# Altium PCB NewSpeedRadar_Board.PcbDoc (part 4 of 4)
Units mm, origin at the board's own origin, x right, y up, seen from the top; angles counter-clockwise.
Board outline 150 x 110 mm, 2 copper layers (Top Layer, Bottom Layer), stack 1.571 mm thick; 208 components, 164 nets, 788 pads, 782 vias.
Unrouted connection lines stored in the file: 231.
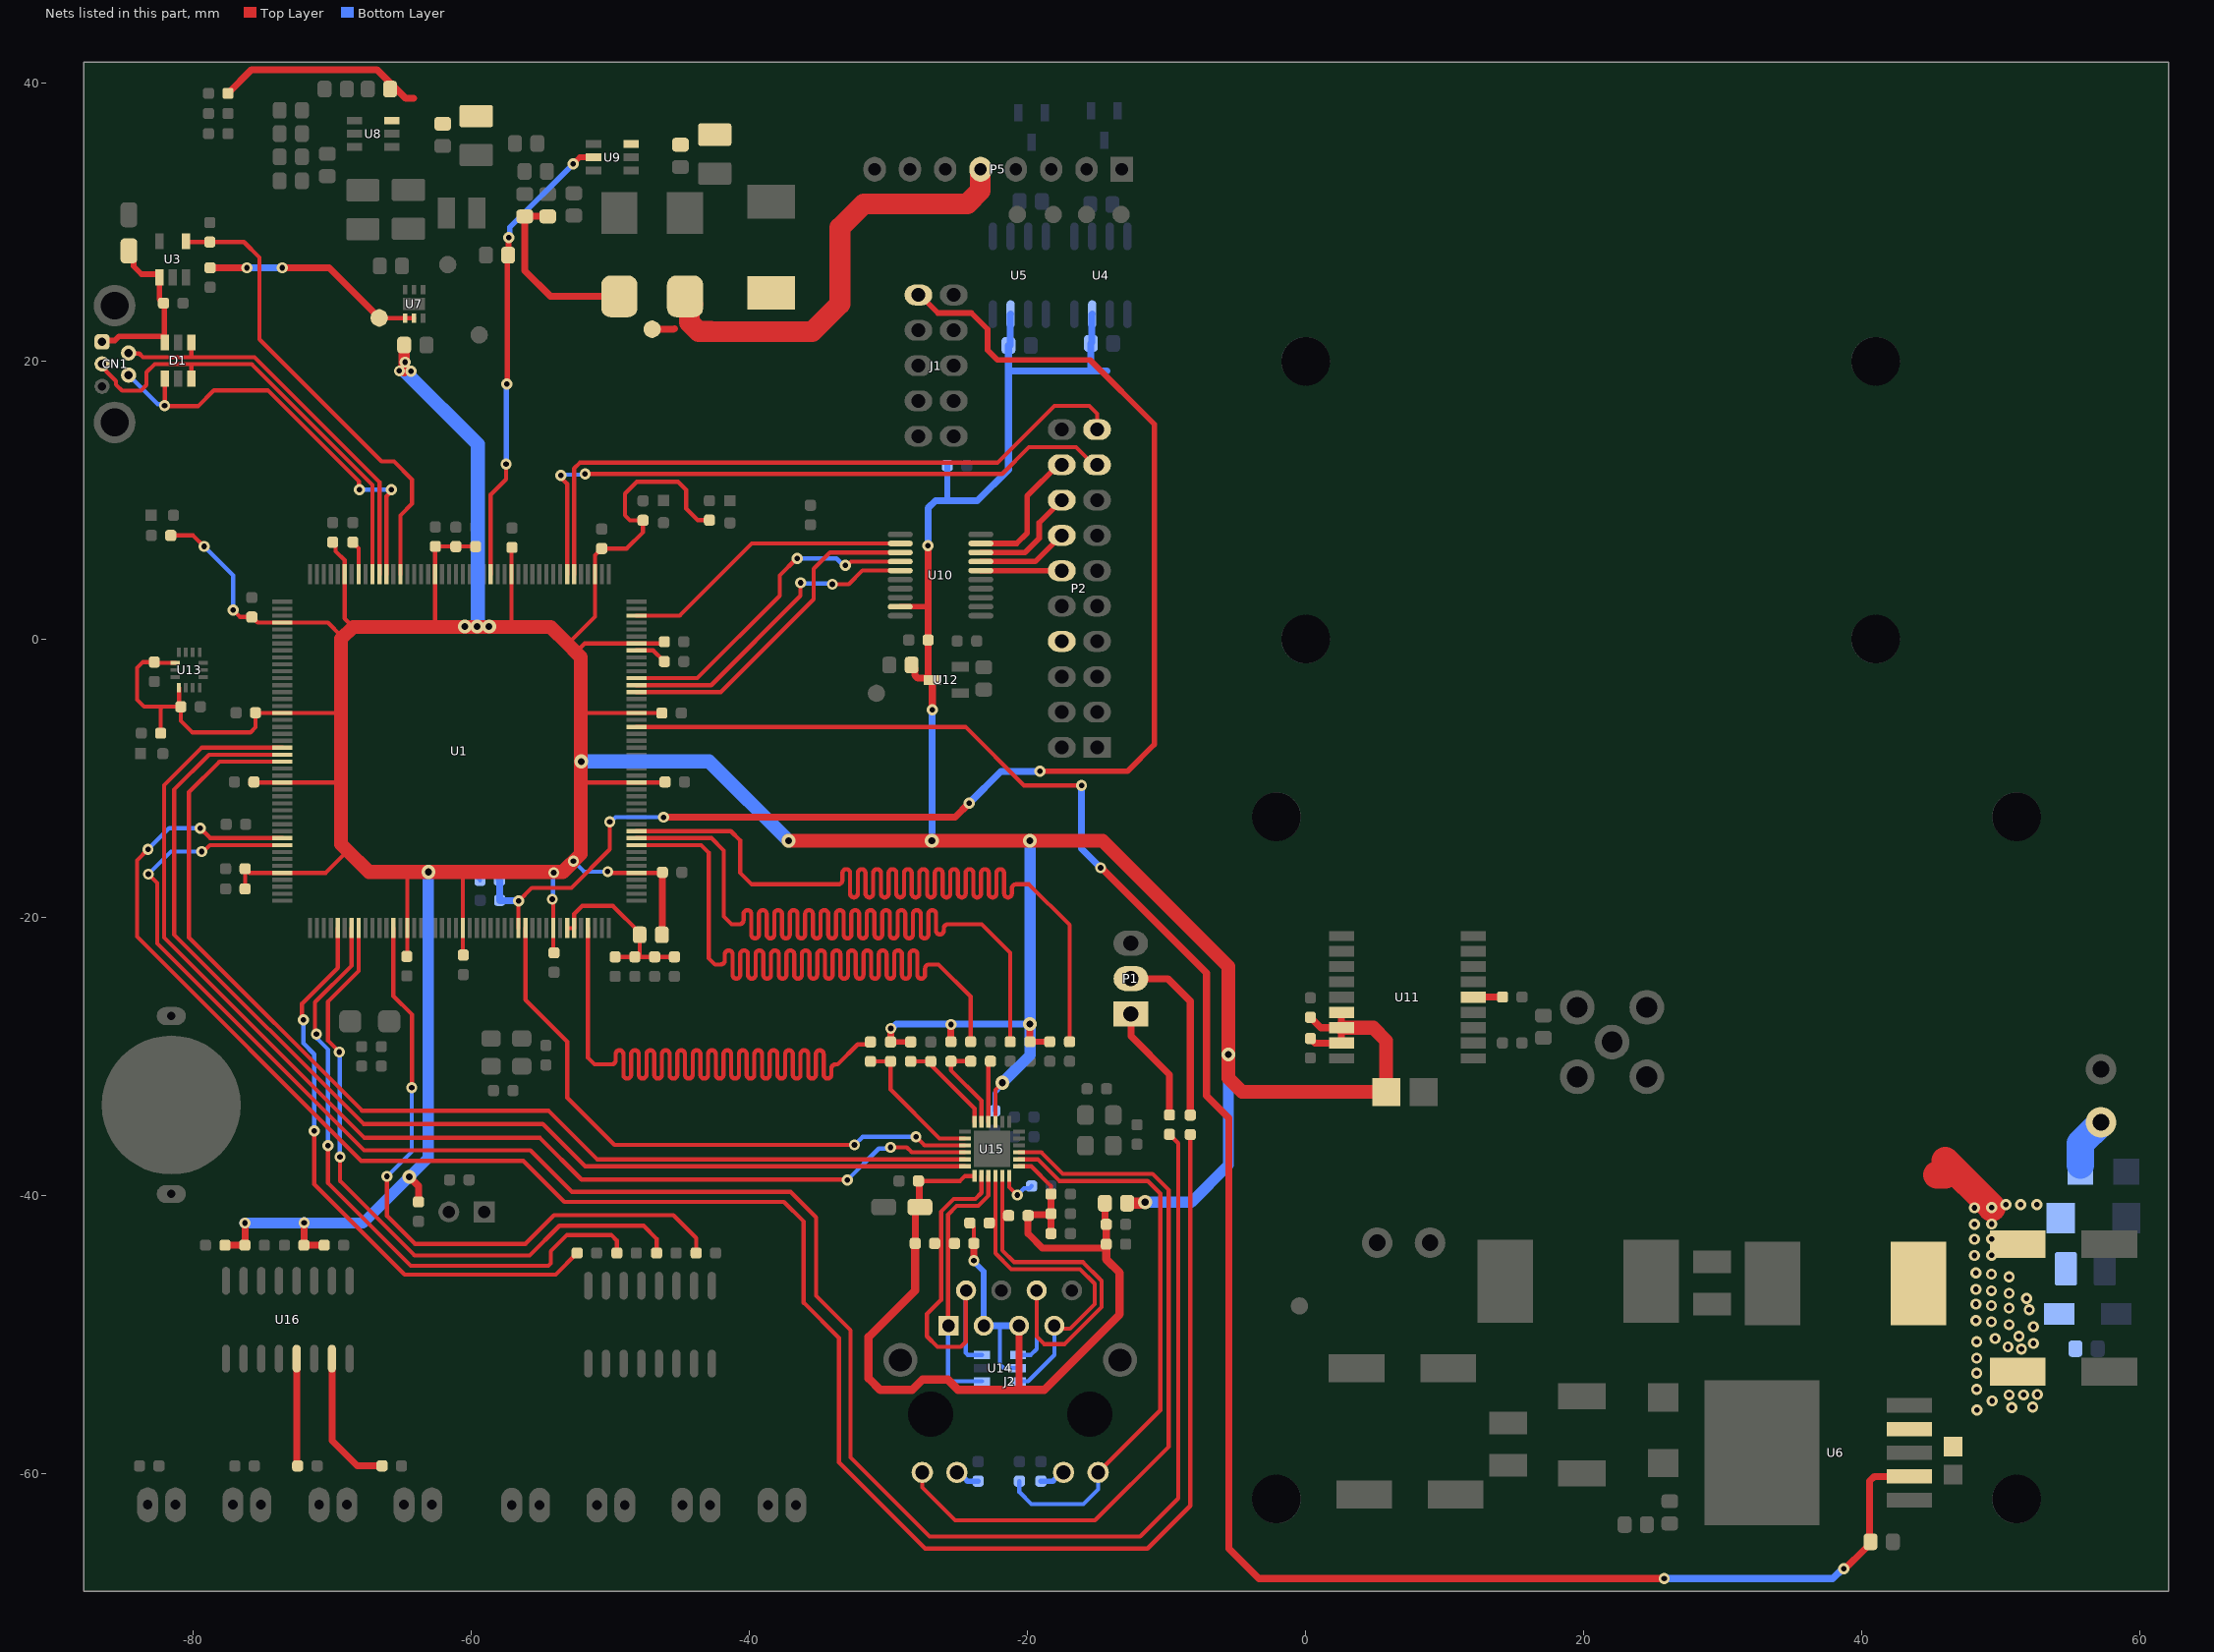
[diagram p3: the nets of this part, all layers, seen from the top]

## Via types
v1: diameter 0.8, hole 0.4, Top Layer to Bottom Layer, tented both sides, 480 vias
v2: diameter 0.8, hole 0.4, Top Layer to Bottom Layer, 288 vias
v3: diameter 1, hole 0.5, Top Layer to Bottom Layer, tented both sides, 14 vias

## Nets (pads, with @x,y where several pads share a name; then routed paths per layer and width w, separated by ;. In a path a pad name is that pad's centre, name@x,y a point inside that pad or via, vN(x,y) a via of type N, cw(c..) or ccw(c..) an arc to the next point about the centre after c; other vN are vias at no path point) (continued)
NetR48_2: R48.2 R55.1 U15.11 | length 6.7
  Top Layer w0.3: R55.1@-24.092,-30.356 R48.2@-25.515,-30.356 -25.515,-30.991 -23.314,-33.191 U15.11@-23.314,-34.711
NetR53_1: R53.1 U15.10 | length 4.4
  Top Layer w0.3: U15.10@-22.814,-34.711 -22.814,-30.5 R53.1@-22.67,-30.356
NetR54_1: R54.1 U15.24 | length 2.9
  Top Layer w0.3: U15.24@-21.314,-38.611 -21.314,-39.407 v1(-20.74,-39.982)
  Bottom Layer w0.3: v1(-20.74,-39.982) -20.26,-39.502 -19.885,-39.502 R54.1@-19.715,-39.333
NetR56_1: R56.1 R57.1 U15.12 | length 7.1
  Top Layer w0.3: R56.1@-28.41,-30.37 R57.1@-26.963,-30.37 ; R57.1@-26.937,-30.37 -26.937,-30.635 -23.814,-33.758 U15.12@-23.814,-34.711
NetR59_2: R59.2 R60.1 U15.14 | length 10.3
  Top Layer w0.3: R60.1@-31.306,-30.37 R59.2@-29.858,-30.37 -29.858,-32.388 -26.335,-35.911 U15.14@-24.514,-35.911
NetR62_2: R62.2 U16.5 | length 7.7
  Top Layer w0.5: U16.5@-72.581,-51.748 -72.581,-59.391 R62.2@-72.508,-59.464
NetR64_2: R64.2 U16.7 | length 10.2
  Top Layer w0.5: U16.7@-70.041,-51.748 -70.022,-51.767 -70.022,-57.654 -68.212,-59.464 R64.2@-66.437,-59.464
Out1: R9.1 U1.13 | length 47.7
  Top Layer w0.3: v1(-66.079,-38.636) -66.079,-41.481 -64.072,-43.487 -56.122,-43.487 -54.064,-41.43 -45.479,-41.43 -43.842,-43.067 R9.1@-43.842,-44.148 ; U1.13@-65.622,-20.779 -65.622,-25.656 -64.275,-27.003 -64.275,-32.235 v1(-64.301,-32.261)
  Bottom Layer w0.3: v1(-66.079,-38.636) -64.301,-36.858 v1(-64.301,-32.261)
Out2: R10.1 U1.8 | length 46.7
  Top Layer w0.3: v1(-69.508,-29.695) -70.32,-28.882 -70.32,-26.063 -68.122,-23.864 U1.8@-68.122,-20.779 ; v1(-69.457,-37.239) -69.457,-38.966 -64.097,-44.326 -55.817,-44.326 -53.683,-42.192 -47.613,-42.192 -46.687,-43.118 R10.1@-46.687,-44.148
  Bottom Layer w0.3: v1(-69.508,-29.695) -69.482,-29.721 -69.482,-37.214 v1(-69.457,-37.239)
Out3: R16.1 U1.7 | length 45.5
  Top Layer w0.3: v1(-71.159,-28.4) -71.254,-28.304 -71.254,-26.108 -68.622,-23.475 U1.7@-68.622,-20.779 ; v1(-70.32,-36.426) -70.32,-39.119 -64.377,-45.062 -54.469,-45.062 -54.293,-44.886 -54.293,-44.021 -53.125,-42.852 -49.95,-42.852 -49.546,-43.256 R16.1@-49.546,-44.148
  Bottom Layer w0.3: v1(-71.159,-28.4) -71.063,-28.495 -71.063,-28.775 -70.32,-29.517 v1(-70.32,-36.426)
Out4: R21.1 U1.5 | length 42.1
  Top Layer w0.3: v1(-72.098,-27.384) -72.194,-27.288 -72.194,-26.209 -69.622,-23.637 U1.5@-69.622,-20.779 ; v1(-71.311,-35.359) -71.311,-39.195 -64.809,-45.697 -53.952,-45.697 R21.1@-52.402,-44.148
  Bottom Layer w0.3: v1(-72.098,-27.384) -72.098,-29.06 -71.311,-29.848 v1(-71.311,-35.359)
PC_RX: P1.1 R35.1 | length 8.9
  Top Layer w0.5: P1.1@-12.563,-26.952 -12.563,-28.55 -9.792,-31.321 R35.1@-9.792,-34.216 ; P1.1@-12.309,-26.952 P1.1@-12.309,-26.444
PC_TX: P1.2 R36.1 | length 13.1
  Top Layer w0.5: P1.2@-12.563,-24.412 -9.919,-24.412 -8.294,-26.038 R36.1@-8.294,-34.228
PHI_LEDGRN_A: J2.9 U15.3 | length 52.3
  Top Layer w0.3: J2.9@-27.575,-59.931 -27.575,-61.011 -25.21,-63.376 -15.152,-63.376 -9.843,-58.067 -9.843,-39.627 -11.011,-38.458 -17.463,-38.458 -19.011,-36.911 U15.3@-20.614,-36.911
PHI_LEDGRN_K: J2.10 R58.1 | length 1.8
  Bottom Layer w0.4: J2.10@-25.085,-59.931 -24.957,-59.931 -24.328,-60.559 R58.1@-23.559,-60.559
PHI_LEDYEL_A: J2.12 R42.2 U15.2 | length 41.6
  Top Layer w0.3: U15.2@-20.614,-37.411 -19.273,-37.411 -17.717,-38.966 -11.367,-38.966 -10.453,-39.881 -10.453,-55.459 J2.12@-14.925,-59.931
  Bottom Layer w0.3: R42.2@-20.587,-60.559 -20.587,-61.344 -19.724,-62.207 -15.975,-62.207 -14.925,-61.157 J2.12@-14.925,-59.931
PHI_LEDYEL_K: J2.11 R43.2 | length 1.9
  Bottom Layer w0.4: R43.2@-19.038,-60.559 -18.171,-60.559 -17.542,-59.931 J2.11@-17.415,-59.931
PHI_RCT: C66.2 C67.2 C70.2 C71.2 C72.1 C75.2 C76.2 FB2.1 J2.3 J2.5 R44.2 R45.2 R49.2 R50.2 U14.5 U15.1 U15.19 | length 84.4
  Top Layer w0.3: C70.2@-27.849,-38.966 -24.854,-38.966 -24.499,-38.611 U15.19@-23.814,-38.611 ; R44.2@-24.157,-41.989 -24.157,-42.016 -23.864,-42.309 R50.2@-23.864,-43.462 ; U15.1@-20.614,-37.911 -19.738,-37.911 -18.315,-39.333 C71.2@-18.315,-39.906 C71.2@-18.315,-40.287
  Top Layer w0.5: R45.2@-28.083,-43.462 -28.083,-41.184 C72.1@-27.745,-40.846 -27.797,-40.794 -27.797,-39.018 C70.2@-27.849,-38.966 ; v1(-23.864,-44.688) R50.2@-23.864,-43.462 ; J2.5@-20.615,-49.381 -20.615,-53.926 -20.563,-53.978 ; -19.963,-42.765 R49.2@-19.963,-41.455 -19.9,-41.392 -18.379,-41.392 C76.2@-18.315,-41.328 ; -19.914,-42.814 -18.936,-43.792 -14.62,-43.792 C67.2@-14.34,-43.513 C66.2@-14.34,-42.09 ; C71.2@-18.315,-40.287 C76.2@-18.315,-41.328 ; C75.2@-18.191,-42.875 C75.2@-18.315,-42.751 C76.2@-18.315,-41.328 ; C66.2@-14.44,-42.09 FB2.1@-14.44,-40.566
  Top Layer w0.6: R45.2@-28.083,-43.462 -28.083,-46.842 -31.435,-50.193 -31.435,-53.165 -30.596,-54.003 -28.31,-54.003 -27.574,-53.266 -25.72,-53.266 -25.008,-53.978 -20.563,-53.978 -18.785,-53.978 -13.374,-48.566 -13.374,-45.57 -14.34,-44.603 -14.34,-43.792 C67.2@-14.34,-43.513
  Bottom Layer w0.3: -22.087,-49.381 -21.986,-49.482 -21.986,-52.174 -21.833,-52.327 -21.732,-52.428 U14.5@-20.684,-52.428
  Bottom Layer w0.4: v1@-23.864,-44.769 -23.155,-45.478 J2.3@-23.155,-49.381
  Bottom Layer w0.5: v1@-23.864,-44.769 v1(-23.864,-44.688) ; J2.3@-23.155,-49.381 -22.087,-49.381 J2.5@-20.615,-49.381
RADAR_PWR_EN: R24.1 U1.106 U9.5 | length 33.6
  Top Layer w0.3: U1.106@-58.622,4.671 -58.622,10.401 -57.519,11.504 v1(-57.519,12.596)
  Top Layer w0.4: v1(-57.468,18.362) -57.417,18.412 -57.417,27.582 R24.1@-57.366,27.633 -57.341,27.658 -57.341,28.877 v1(-57.316,28.903) ; v1(-52.693,34.186) -52.21,34.668 U9.5@-51.223,34.668
  Bottom Layer w0.4: v1(-57.519,12.596) -57.493,12.621 -57.493,18.336 v1(-57.468,18.362) ; v1(-57.316,28.903) -57.239,28.979 -57.239,29.64 v1(-52.693,34.186)
RD_N: J2.7 R44.1 U14.6 U15.22 | length 24.3
  Top Layer w0.3: U15.22@-22.314,-38.611 -22.314,-44.169 -21.175,-45.308 -16.222,-45.308 -15.171,-46.36 -15.171,-47.823 -16.948,-49.6 -17.855,-49.6 J2.7@-18.075,-49.381
  Bottom Layer w0.3: U14.6@-20.684,-53.378 -19.964,-53.378 -18.075,-51.489 J2.7@-18.075,-49.381
RD_P: J2.6 R49.1 U14.4 U15.23 | length 30.3
  Top Layer w0.3: U15.23@-21.814,-38.611 -21.814,-43.962 -20.968,-44.808 -16.015,-44.808 -15.869,-44.955 -14.903,-45.92 -14.671,-46.153 -14.671,-48.034 -17.338,-50.701 -18.811,-50.701 -19.345,-50.167 J2.6@-19.345,-46.841
  Bottom Layer w0.3: U14.4@-20.684,-51.478 -19.766,-51.478 -19.345,-51.057 J2.6@-19.345,-46.841
RESET#: C13.2 J1.10 R11.2 U1.31 | length 101.1
  Top Layer w0.3: U1.31@-56.622,-20.779 -56.622,-18.841 v1(-56.604,-18.824) -55.665,-17.884 -52.82,-17.884 -50.051,-15.116 v1(-50.051,-13.134)
  Top Layer w0.4: J1.10@-27.852,24.762 -27.75,24.762 -26.455,23.467 -24.042,23.467 -22.873,22.299 -22.873,20.798 -22.164,20.089 -15.507,20.089 -10.886,15.468 -10.886,-7.572 -12.816,-9.502 v1(-19.116,-9.502)
  Top Layer w0.5: v1(-46.19,-12.804) -25.212,-12.804 v1(-24.196,-11.788)
  Bottom Layer w0.3: v1(-50.051,-13.134) -49.956,-13.134 -49.625,-12.804 v1(-46.19,-12.804)
  Bottom Layer w0.5: R11.2@-57.99,-17.332 -57.985,-17.337 -57.985,-18.774 C13.2@-57.979,-18.78 -57.957,-18.802 -56.627,-18.802 v1(-56.604,-18.824) ; v1(-24.196,-11.788) -21.91,-9.502 v1(-19.116,-9.502)
RK3588_RX_M2_3V3: P2.19 U1.94 | length 48.5
  Top Layer w0.3: U1.94@-52.622,4.671 -52.622,12.286 -52.21,12.697 -22.162,12.697 -18.073,16.787 -15.558,16.787 -14.999,16.228 P2.19@-14.999,15.085
RK3588_TX_M2_3V3: P2.17 U1.95 | length 47.3
  Top Layer w0.3: v1(-53.582,11.783) -53.582,11.648 -53.122,11.188 U1.95@-53.122,4.671 ; v1(-51.829,11.885) -21.832,11.885 -19.901,13.815 -16.519,13.815 -15.249,12.545 P2.17@-14.999,12.545
  Bottom Layer w0.3: v1(-53.582,11.783) -53.531,11.834 -51.88,11.834 v1(-51.829,11.885)
RK_PWR_EN: R20.1 U1.70 U6.2 | length 148.7
  Top Layer w0.3: U1.70@-48.147,-6.304 -24.472,-6.304 -20.259,-10.518 v1(-16.118,-10.518)
  Top Layer w0.5: v1(-14.747,-16.436) -14.696,-16.436 -7.127,-24.006 -7.127,-32.845 -5.527,-34.445 -5.527,-65.408 -3.368,-67.567 v1(25.792,-67.567) ; v1(38.72,-66.855) 38.801,-66.855 38.951,-66.705 38.957,-66.705 40.064,-65.598 40.644,-65.019 R20.1@40.644,-64.919 40.576,-64.851 40.576,-60.556 40.914,-60.218 U6.2@43.425,-60.218
  Bottom Layer w0.5: v1(-16.118,-10.518) -16.118,-15.065 v1(-14.747,-16.436) ; v1(25.792,-67.567) 37.928,-67.567 38.639,-66.855 v1(38.72,-66.855)
RMII_CRS_DV: R55.2 U1.53 | length 82.7
  Top Layer w0.3: U1.53@-48.147,-14.804 -43.479,-14.804 -42.939,-15.344 -42.939,-22.939 -42.482,-23.396 -42.228,-23.396 -42.078,-23.396 ccw(c-42.078,-23.096) -41.778,-23.096 -41.778,-22.657 cw(c-41.501,-22.657) -41.224,-22.657 -41.224,-24.135 ccw(c-40.947,-24.135) -40.67,-24.135 -40.67,-22.657 cw(c-40.393,-22.657) -40.116,-22.657 -40.116,-24.135 ccw(c-39.839,-24.135) -39.562,-24.135 -39.562,-22.657 cw(c-39.285,-22.657) -39.008,-22.657 -39.008,-24.135 ccw(c-38.731,-24.135) -38.454,-24.135 -38.454,-22.657 cw(c-38.177,-22.657) -37.9,-22.657 -37.9,-24.135 ccw(c-37.623,-24.135) -37.346,-24.135 -37.346,-22.657 cw(c-37.069,-22.657) -36.792,-22.657 -36.792,-24.135 ccw(c-36.515,-24.135) -36.238,-24.135 -36.238,-22.657 cw(c-35.961,-22.657) -35.684,-22.657 -35.684,-24.135 ccw(c-35.407,-24.135) -35.13,-24.135 -35.13,-22.657 cw(c-34.853,-22.657) -34.576,-22.657 -34.576,-24.135 ccw(c-34.299,-24.135) -34.022,-24.135 -34.022,-22.657 cw(c-33.745,-22.657) -33.468,-22.657 -33.468,-24.135 ccw(c-33.191,-24.135) -32.914,-24.135 -32.914,-22.657 cw(c-32.637,-22.657) -32.36,-22.657 -32.36,-24.135 ccw(c-32.083,-24.135) -31.806,-24.135 -31.806,-22.657 cw(c-31.529,-22.657) -31.252,-22.657 -31.252,-24.135 ccw(c-30.975,-24.135) -30.698,-24.135 -30.698,-22.657 cw(c-30.421,-22.657) -30.144,-22.657 -30.144,-24.135 ccw(c-29.867,-24.135) -29.59,-24.135 -29.59,-22.657 cw(c-29.313,-22.657) -29.036,-22.657 -29.036,-24.135 ccw(c-28.759,-24.135) -28.482,-24.135 -28.482,-22.657 cw(c-28.205,-22.657) -27.928,-22.657 -27.928,-24.135 ccw(c-27.651,-24.135) -27.374,-24.135 -27.374,-23.696 cw(c-27.074,-23.696) -27.074,-23.396 -26.531,-23.396 -26.403,-23.396 -24.092,-25.706 -24.092,-26.006 ; R55.2@-24.092,-28.956 -24.092,-27.257 -24.092,-25.936
RMII_nRESET: U1.32 U15.15 | length 44
  Top Layer w0.3: U1.32@-56.122,-20.779 -56.122,-25.936 -53.112,-28.946 -53.112,-32.984 -49.721,-36.375 v1(-32.449,-36.375) ; v1(-28.029,-35.791) -27.41,-36.411 U15.15@-24.514,-36.411
  Bottom Layer w0.3: v1(-32.449,-36.375) -31.865,-35.791 v1(-28.029,-35.791)
RMII_REF_CLK: R60.2 U1.41 | length 80.5
  Top Layer w0.3: U1.41@-51.622,-20.779 -51.622,-30.106 -51.143,-30.584 -50.813,-30.584 -49.929,-30.584 ccw(c-49.929,-30.284) -49.629,-30.284 -49.629,-29.845 cw(c-49.352,-29.845) -49.075,-29.845 -49.075,-31.323 ccw(c-48.798,-31.323) -48.521,-31.323 -48.521,-29.845 cw(c-48.244,-29.845) -47.967,-29.845 -47.967,-31.323 ccw(c-47.69,-31.323) -47.413,-31.323 -47.413,-29.845 cw(c-47.136,-29.845) -46.859,-29.845 -46.859,-31.323 ccw(c-46.582,-31.323) -46.305,-31.323 -46.305,-29.845 cw(c-46.028,-29.845) -45.751,-29.845 -45.751,-31.323 ccw(c-45.474,-31.323) -45.197,-31.323 -45.197,-29.845 cw(c-44.92,-29.845) -44.643,-29.845 -44.643,-31.323 ccw(c-44.366,-31.323) -44.089,-31.323 -44.089,-29.845 cw(c-43.812,-29.845) -43.535,-29.845 -43.535,-31.323 ccw(c-43.258,-31.323) -42.981,-31.323 -42.981,-29.845 cw(c-42.704,-29.845) -42.427,-29.845 -42.427,-31.323 ccw(c-42.15,-31.323) -41.873,-31.323 -41.873,-29.845 cw(c-41.596,-29.845) -41.319,-29.845 -41.319,-31.323 ccw(c-41.042,-31.323) -40.765,-31.323 -40.765,-29.845 cw(c-40.488,-29.845) -40.211,-29.845 -40.211,-31.323 ccw(c-39.934,-31.323) -39.657,-31.323 -39.657,-29.845 cw(c-39.38,-29.845) -39.103,-29.845 -39.103,-31.323 ccw(c-38.826,-31.323) -38.549,-31.323 -38.549,-29.845 cw(c-38.272,-29.845) -37.995,-29.845 -37.995,-31.323 ccw(c-37.718,-31.323) -37.441,-31.323 -37.441,-29.845 cw(c-37.164,-29.845) -36.887,-29.845 -36.887,-31.323 ccw(c-36.61,-31.323) -36.333,-31.323 -36.333,-29.845 cw(c-36.056,-29.845) -35.779,-29.845 -35.779,-31.323 ccw(c-35.502,-31.323) -35.225,-31.323 -35.225,-29.845 cw(c-34.948,-29.845) -34.671,-29.845 -34.671,-31.323 ccw(c-34.394,-31.323) -34.117,-31.323 -34.117,-30.884 cw(c-33.817,-30.884) -33.817,-30.584 -33.667,-30.584 -32.229,-29.146 -31.482,-29.146 R60.2@-31.306,-28.97
RMII_RXD0: R51.2 U1.54 | length 85.3
  Top Layer w0.3: U1.54@-48.147,-14.304 -42.736,-14.304 -41.847,-15.193 -41.847,-19.942 -41.288,-20.5 -40.882,-20.5 -40.732,-20.5 ccw(c-40.732,-20.2) -40.432,-20.2 -40.432,-19.761 cw(c-40.155,-19.761) -39.878,-19.761 -39.878,-21.239 ccw(c-39.601,-21.239) -39.324,-21.239 -39.324,-19.761 cw(c-39.047,-19.761) -38.77,-19.761 -38.77,-21.239 ccw(c-38.493,-21.239) -38.216,-21.239 -38.216,-19.761 cw(c-37.939,-19.761) -37.662,-19.761 -37.662,-21.239 ccw(c-37.385,-21.239) -37.108,-21.239 -37.108,-19.761 cw(c-36.831,-19.761) -36.554,-19.761 -36.554,-21.239 ccw(c-36.277,-21.239) -36,-21.239 -36,-19.761 cw(c-35.723,-19.761) -35.446,-19.761 -35.446,-21.239 ccw(c-35.169,-21.239) -34.892,-21.239 -34.892,-19.761 cw(c-34.615,-19.761) -34.338,-19.761 -34.338,-21.239 ccw(c-34.061,-21.239) -33.784,-21.239 -33.784,-19.761 cw(c-33.507,-19.761) -33.23,-19.761 -33.23,-21.239 ccw(c-32.953,-21.239) -32.676,-21.239 -32.676,-19.761 cw(c-32.399,-19.761) -32.122,-19.761 -32.122,-21.239 ccw(c-31.845,-21.239) -31.568,-21.239 -31.568,-19.761 cw(c-31.291,-19.761) -31.014,-19.761 -31.014,-21.239 ccw(c-30.737,-21.239) -30.46,-21.239 -30.46,-19.761 cw(c-30.183,-19.761) -29.906,-19.761 -29.906,-21.239 ccw(c-29.629,-21.239) -29.352,-21.239 -29.352,-19.761 cw(c-29.075,-19.761) -28.798,-19.761 -28.798,-21.239 ccw(c-28.521,-21.239) -28.244,-21.239 -28.244,-19.761 cw(c-27.967,-19.761) -27.69,-19.761 -27.69,-21.239 ccw(c-27.413,-21.239) -27.136,-21.239 -27.136,-19.761 cw(c-26.859,-19.761) -26.582,-19.761 -26.582,-20.962 ccw(c-26.305,-20.962) -26.028,-20.962 -26.028,-20.8 cw(c-25.728,-20.8) -25.728,-20.5 -25.164,-20.5 -24.6,-20.5 -23.305,-20.5 -21.248,-22.558 R51.2@-21.248,-28.956
RMII_RXD1: R52.2 U1.55 | length 82.9
  Top Layer w0.3: U1.55@-48.147,-13.804 -41.339,-13.804 -40.679,-14.465 -40.679,-16.792 -39.84,-17.63 -33.77,-17.63 -33.62,-17.63 ccw(c-33.62,-17.33) -33.32,-17.33 -33.32,-16.815 cw(c-33.043,-16.815) -32.766,-16.815 -32.766,-18.293 ccw(c-32.489,-18.293) -32.212,-18.293 -32.212,-16.815 cw(c-31.935,-16.815) -31.658,-16.815 -31.658,-18.293 ccw(c-31.381,-18.293) -31.104,-18.293 -31.104,-16.815 cw(c-30.827,-16.815) -30.55,-16.815 -30.55,-18.293 ccw(c-30.273,-18.293) -29.996,-18.293 -29.996,-16.815 cw(c-29.719,-16.815) -29.442,-16.815 -29.442,-18.293 ccw(c-29.165,-18.293) -28.888,-18.293 -28.888,-16.815 cw(c-28.611,-16.815) -28.334,-16.815 -28.334,-18.293 ccw(c-28.057,-18.293) -27.78,-18.293 -27.78,-16.815 cw(c-27.503,-16.815) -27.226,-16.815 -27.226,-18.293 ccw(c-26.949,-18.293) -26.672,-18.293 -26.672,-16.815 cw(c-26.395,-16.815) -26.118,-16.815 -26.118,-18.293 ccw(c-25.841,-18.293) -25.564,-18.293 -25.564,-16.815 cw(c-25.287,-16.815) -25.01,-16.815 -25.01,-18.293 ccw(c-24.733,-18.293) -24.456,-18.293 -24.456,-16.815 cw(c-24.179,-16.815) -23.902,-16.815 -23.902,-18.293 ccw(c-23.625,-18.293) -23.348,-18.293 -23.348,-16.815 cw(c-23.071,-16.815) -22.794,-16.815 -22.794,-18.293 ccw(c-22.517,-18.293) -22.24,-18.293 -22.24,-16.815 cw(c-21.963,-16.815) -21.686,-16.815 -21.686,-18.293 ccw(c-21.409,-18.293) -21.132,-18.293 -21.132,-17.93 cw(c-20.832,-17.93) -20.832,-17.63 -20.003,-17.63 -19.901,-17.63 -16.98,-20.551 R52.2@-16.98,-28.956
RMII_TX_EN: U1.154 U15.16 | length 86.5
  Top Layer w0.3: U1.154@-73.597,-7.804 -79.418,-7.804 -82.106,-10.493 -82.106,-21.466 -67.704,-35.867 -55.08,-35.867 -52.083,-38.865 -32.982,-38.865 v1(-32.957,-38.89) ; v1(-29.858,-36.553) -28.685,-36.553 -28.328,-36.911 U15.16@-24.514,-36.911
  Bottom Layer w0.3: v1(-32.957,-38.89) -30.708,-36.641 -29.946,-36.641 v1(-29.858,-36.553)
RMII_TXD0: U1.156 U15.17 | length 80.5
  Top Layer w0.3: U1.156@-73.597,-8.804 -78.132,-8.804 -80.328,-11.001 -80.328,-21.466 -67.882,-33.912 -54.465,-33.912 -50.966,-37.411 U15.17@-24.514,-37.411
RMII_TXD1: U1.155 U15.18 | length 83
  Top Layer w0.3: U1.155@-73.597,-8.304 -78.876,-8.304 -81.395,-10.823 -81.395,-21.237 -67.768,-34.864 -54.876,-34.864 -51.829,-37.911 U15.18@-24.514,-37.911
RO1_3V3: P2.8
SPI1_CLK_M2_1V8: P2.16 U10.8 | length 8
  Top Layer w0.4: U10.8@-23.362,6.238 -20.188,6.238 -19.165,7.262 -19.165,8.379 P2.16@-17.539,10.005
SPI1_CLK_M2_3V3: U1.75 U10.13 | length 24.4
  Top Layer w0.3: U1.75@-48.147,-3.804 -42.061,-3.804 -35.383,2.874 -35.383,5.065 -34.209,6.238 U10.13@-29.162,6.238
SPI1_CS0_M2_1V8: P2.18 U10.9 | length 9.7
  Top Layer w0.4: U10.9@-23.362,6.888 -20.783,6.888 -20.028,7.643 -20.028,10.306 -17.789,12.545 P2.18@-17.539,12.545
SPI1_CS0_M2_3V3: U1.86 U10.12 | length 21.1
  Top Layer w0.3: U1.86@-48.147,1.696 -45.026,1.696 -39.833,6.888 U10.12@-29.162,6.888
SPI1_MISO_M2_1V8: P2.12 U10.6 | length 5.8
  Top Layer w0.4: U10.6@-23.362,4.938 -17.553,4.938 P2.12@-17.539,4.925
SPI1_MISO_M2_3V3: U1.76 U10.15 | length 23
  Top Layer w0.3: U1.76@-48.147,-3.304 -42.761,-3.304 -36.335,3.122 v1(-36.335,4.061) ; v1(-34.049,3.96) -32.855,3.96 -31.877,4.938 U10.15@-29.162,4.938
  Bottom Layer w0.3: v1(-36.335,4.061) -36.284,4.011 -34.1,4.011 v1(-34.049,3.96)
SPI1_MOSI_M2_1V8: P2.14 U10.7 | length 6.6
  Top Layer w0.4: U10.7@-23.362,5.588 -19.456,5.588 -17.579,7.465 P2.14@-17.539,7.465
SPI1_MOSI_M2_3V3: U1.77 U10.14 | length 23.7
  Top Layer w0.3: U1.77@-48.147,-2.804 -43.76,-2.804 -37.834,3.122 -37.834,4.584 -36.603,5.814 v1(-36.564,5.814) ; v1(-33.109,5.31) -32.974,5.31 -32.697,5.587 -29.163,5.587 U10.14@-29.162,5.588
  Bottom Layer w0.3: v1(-36.564,5.814) -33.748,5.814 -33.245,5.31 v1(-33.109,5.31)
TD_N: J2.2 R45.1 U14.3 U15.20 | length 27
  Top Layer w0.3: J2.2@-24.453,-46.841 J2.2@-24.453,-46.739 ; J2.2@-24.425,-46.841 -24.453,-46.869 -24.453,-50.554 -24.804,-50.904 -26.482,-50.904 -27.242,-50.144 -27.242,-48.54 -26.223,-47.521 -26.223,-41.177 -25.307,-40.262 -23.76,-40.262 -23.314,-39.816 U15.20@-23.314,-38.611
  Bottom Layer w0.3: J2.2@-24.453,-46.739 -24.453,-51.328 -24.303,-51.478 U14.3@-23.284,-51.478
TD_P: J2.1 R50.1 U14.1 U15.21 | length 19.3
  Top Layer w0.3: J2.1@-25.695,-49.381 -25.723,-49.352 -25.723,-41.384 -25.1,-40.762 -23.553,-40.762 -22.814,-40.023 -22.814,-38.886 U15.21@-22.814,-38.611
  Bottom Layer w0.3: J2.1@-25.723,-49.279 -25.723,-53.084 -25.428,-53.378 U14.1@-23.284,-53.378
UART_RX: R36.2 U1.167 | length 147.8
  Top Layer w0.3: v1(-83.274,-15.116) -84.062,-15.903 -84.062,-21.389 -67.933,-37.518 -56.274,-37.518 -53.328,-40.465 -37.529,-40.465 -36.107,-41.887 -36.107,-47.729 -33.568,-50.268 -33.568,-59.208 -27.369,-65.408 -11.367,-65.408 -8.294,-62.334 R36.2@-8.294,-35.628 ; v1(-79.515,-13.592) -78.802,-14.304 U1.167@-73.597,-14.304
  Bottom Layer w0.3: v1(-83.274,-15.116) -81.75,-13.592 v1(-79.515,-13.592)
UART_TX: R35.2 U1.168 | length 143.1
  Top Layer w0.3: v1(-83.249,-16.894) -82.606,-17.537 -82.606,-21.88 -67.73,-36.756 -55.766,-36.756 -52.769,-39.754 -37.046,-39.754 -35.218,-41.582 -35.218,-47.221 -32.73,-49.709 -32.73,-58.853 -27.039,-64.544 -11.9,-64.544 -9.157,-61.801 -9.157,-36.251 R35.2@-9.792,-35.616 ; v1(-79.414,-15.268) -79.278,-15.268 -78.815,-14.804 U1.168@-73.597,-14.804
  Bottom Layer w0.3: v1(-83.249,-16.894) -81.623,-15.268 v1(-79.414,-15.268)
USB_FS1_D_N: CN1.2 D1.4 U1.122 | length 29.6
  Top Layer w0.3: CN1.2@-84.67,20.597 -84.624,20.551 -83.902,20.551 -83.64,20.289 -80.15,20.289 ; D1.4@-80.15,21.343 -80.15,20.289 ; U1.122@-66.622,4.671 -66.622,11.306 -75.605,20.289 -80.15,20.289
USB_FS1_D_P: CN1.3 D1.3 U1.123 | length 33
  Top Layer w0.3: CN1.3@-86.57,19.797 -86.57,19.58 -86.275,19.285 -86.275,19.278 -85.57,18.573 -85.57,18.315 -85.134,17.879 -83.784,17.879 -83.378,18.285 -83.378,19.205 -82.793,19.789 -80.252,19.789 ; D1.3@-80.15,18.743 -80.15,19.687 -80.252,19.789 ; U1.123@-67.122,4.671 -67.122,11.099 -75.812,19.789 -80.252,19.789
USB_FS1_ID: CN1.4 D1.1 U1.121 | length 31.7
  Top Layer w0.3: D1.1@-82.05,18.743 -82.066,18.727 -82.066,16.828 v1(-82.082,16.812) -82.031,16.761 -79.668,16.761 -78.525,17.904 -74.664,17.904 -68.094,11.335 -68.094,10.801 v1(-68.06,10.767) ; U1.121@-66.122,4.671 -66.122,10.284 -65.774,10.632 v1(-65.774,10.767)
  Bottom Layer w0.3: CN1.4@-84.67,18.997 -82.581,16.908 -82.178,16.908 v1(-82.082,16.812) ; v1(-68.06,10.767) v1(-65.774,10.767)
USB_PwrSwitchON: R5.1 U1.119 U3.4 | length 34
  Top Layer w0.3: U3.4@-80.546,28.632 -80.486,28.572 R5.1@-78.829,28.572 -76.375,28.572 -75.26,27.457 -75.26,21.574 -66.47,12.784 -65.581,12.784 -64.283,11.486 -64.283,9.743 -65.122,8.905 U1.119@-65.122,4.671
VBUS_FS1: C29.1 CN1.1 D1.6 R8.1 U3.1 | length 13.3
  Top Layer w0.4: CN1.1@-86.57,21.397 -86.485,21.482 -85.668,21.482 -85.359,21.791 D1.6@-82.103,21.791 ; C29.1@-85.029,27.704 C29.1@-84.729,27.704 ; C29.1@-84.648,27.933 -84.309,27.595 -84.309,26.832 -83.738,26.261 -82.546,26.261 -82.446,26.161 U3.1@-82.446,26.032 -82.446,24.468 R8.1@-82.157,24.178 -82.103,24.125 D1.6@-82.103,21.791 ; D1.6@-82.05,21.343 -82.103,21.396 D1.6@-82.103,21.791
VCAP1: C12.2 U1.81 | length 2.3
  Top Layer w0.3: U1.81@-48.147,-0.804 -46.927,-0.804 C12.2@-46.128,-1.603
VCAP2: C2.1 U1.125 | length 2.5
  Top Layer w0.3: C2.1@-68.542,6.982 -68.542,6.955 -68.122,6.535 U1.125@-68.122,4.671
VCC-RF: R2.1 U11.14 | length 2.1
  Top Layer w0.5: U11.14@12.076,-25.744 12.081,-25.739 14.165,-25.739 R2.1@14.17,-25.734
VDD_MCU: +3.3V.1 C4.2 C5.2 C14.1 C15.1 C16.1 C17.1 C18.1 C19.1 C20.1 C21.1 C22.1 C23.1 C24.1 C25.1 C26.1 C27.1 C28.1 C32.2 C39.2 C41.2 C55.1 C56.1 C59.1 C61.2 C64.2 C65.2 C69.2 FB1.1 FB2.2 R1.2 R4.1 R11.1 R12.1 R25.1 R26.1 R27.1 R28.1 R31.2 R33.2 R37.2 R40.1 R46.1 R47.1 R48.1 R56.2 R59.1 R61.2 R63.2 U1.15 U1.23 U1.36 U1.49 U1.62 U1.72 U1.82 U1.91 U1.103 U1.114 U1.127 U1.136 U1.149 U1.159 U1.172 U4.3 U5.3 U7.1 U7.2 U10.19 U11.6 U11.7 U11.8 U12.3 U13.5 U13.8 U15.9 | length 507.4
  Top Layer w0.28: C65.2@-82.817,-1.639 -82.744,-1.712 U13.5@-81.315,-1.712
  Top Layer w0.3: C65.2@-82.817,-1.639 -83.641,-1.639 -84.062,-2.06 -84.062,-4.346 -83.554,-4.854 -82.233,-4.854 ; R25.1@-82.36,-6.759 -82.36,-4.981 -82.233,-4.854 ; R28.1@-81.635,7.465 -80.023,7.465 v1(-79.236,6.678) ; U13.8@-81.053,-3.474 -81.043,-3.484 -81.043,-4.723 C64.2@-80.912,-4.854 ; v1(-77.153,2.106) -76.645,1.598 C26.1@-75.807,1.598 -75.78,1.598 -75.378,1.196 U1.136@-73.597,1.196 -70.325,1.196 -69.381,0.251 -69.381,0.023 ; C24.1@-76.289,-17.96 R4.1@-76.289,-16.513 -76.262,-16.513 -75.97,-16.804 U1.172@-73.597,-16.804 -70.485,-16.804 -69.025,-15.344 -69.025,-15.09 ; C23.1@-75.919,-10.304 U1.159@-73.597,-10.304 -69.472,-10.304 -69.381,-10.213 ; C25.1@-75.539,-5.286 C25.1@-75.539,-5.304 ; C27.1@-69.99,6.982 -69.771,6.763 -69.771,6.332 -69.122,5.682 U1.127@-69.122,4.671 -69.122,1.491 -68.517,0.886 ; -69.381,-5.184 -69.501,-5.304 U1.149@-73.597,-5.304 C25.1@-75.539,-5.304 ; +3.3V.1@-66.637,23.111 -66.628,23.102 -64.797,23.102 U7.1@-64.788,23.093 U7.2@-64.138,23.093 ; C28.1@-64.656,-22.812 -64.622,-22.777 U1.15@-64.622,-20.779 -64.622,-16.884 -64.478,-16.741 ; -62.523,0.886 -62.622,0.985 U1.114@-62.622,4.671 -62.622,6.655 C17.1@-62.599,6.678 -62.592,6.671 -59.71,6.671 C5.2@-59.703,6.663 ; -60.643,-16.741 -60.622,-16.763 U1.23@-60.622,-20.779 -60.622,-22.692 C19.1@-60.592,-22.721 ; -57.189,0.886 -57.122,0.953 U1.103@-57.122,4.671 -57.122,6.567 C18.1@-57.087,6.601 ; v1(-54.191,-18.697) -54.122,-18.767 -54.122,-22.498 C14.1@-54.064,-22.555 ; -53.036,-0.396 -53.036,-0.295 -51.122,1.619 U1.91@-51.122,4.671 -51.122,6.039 C16.1@-50.635,6.525 -48.832,6.525 -47.664,7.694 R27.1@-47.664,8.557 -48.603,8.557 -48.959,8.913 -48.959,10.48 -48.113,11.326 -45.149,11.326 -44.565,10.742 -44.565,9.395 -43.736,8.567 R26.1@-42.888,8.567 ; -52.49,-0.942 -51.852,-0.304 U1.82@-48.147,-0.304 -46.252,-0.304 C22.1@-46.128,-0.18 ; -52.134,-10.188 -52.018,-10.304 U1.62@-48.147,-10.304 -46.118,-10.304 C21.1@-46.078,-10.264 ; -52.134,-5.235 -52.065,-5.304 U1.72@-48.147,-5.304 -46.313,-5.304 C15.1@-46.306,-5.311 ; v1(-50.204,-16.716) -50.115,-16.804 U1.49@-48.147,-16.804 -46.304,-16.804 C20.1@-46.286,-16.786 ; U15.9@-22.314,-34.711 -22.314,-32.413 v3(-21.806,-31.905) ; -82.233,-4.854 C64.2@-80.912,-4.854 ; C64.2@-80.912,-4.854 -80.912,-5.87 -80.074,-6.708 -75.908,-6.708 -75.539,-6.338 C25.1@-75.539,-5.304
  Top Layer w0.4: R59.1@-29.858,-28.97 R56.2@-28.41,-28.97 ; U10.19@-29.162,2.338 -27.181,2.338 ; v1(-27.166,6.728) v1@-27.152,6.714 ; R46.1@-19.825,-28.956 R47.1@-18.403,-28.956
  Top Layer w0.5: R12.1@-78.804,26.721 -78.801,26.718 v1(-76.164,26.718) ; R31.2@-77.734,-43.589 R33.2@-76.304,-43.589 -76.296,-43.582 -76.296,-41.996 v1(-76.289,-41.989) ; v1(-73.609,26.721) -70.247,26.721 +3.3V.1@-66.637,23.111 ; v1(-72.04,-41.982) -72.04,-43.571 R61.2@-72.059,-43.589 R63.2@-70.6,-43.589 ; v3(-64.478,-38.661) -64.478,-38.666 -63.818,-39.326 R40.1@-63.818,-40.476 ; FB1.1@-46.305,-21.262 -46.286,-21.243 -46.286,-16.786 C20.1@-46.267,-16.767 ; R59.1@-29.858,-28.97 -29.845,-28.957 -29.845,-28.006 v1(-29.833,-27.993) ; C61.2@-28.347,-1.857 -28.097,-2.107 -28.097,-2.598 -27.886,-2.809 U12.3@-27.234,-2.809 ; -27.152,2.309 C59.1@-27.152,-0.053 -27.152,-2.824 -27.052,-2.924 U12.3@-26.845,-2.924 -26.854,-2.932 -26.854,-5.074 v1(-26.863,-5.083) ; -27.152,2.338 v1@-27.152,6.714 ; R48.1@-25.515,-28.956 v1(-25.515,-27.714) ; R46.1@-19.825,-28.956 v3(-19.825,-27.689) ; R1.2@0.341,-28.717 0.668,-29.044 U11.8@2.576,-29.044 U11.7@2.576,-27.944 ; C56.1@0.341,-27.196 1.089,-27.944 U11.7@2.576,-27.944 ; U11.6@2.576,-26.844 U11.7@2.576,-27.944
  Top Layer w0.8: v1@-64.847,19.314 C41.2@-64.847,21.156 ; FB2.2@-12.84,-40.566 -11.621,-40.566 v3(-11.545,-40.49)
  Top Layer w1: v3(-37.199,-14.506) v3(-26.886,-14.506) v3(-19.825,-14.506) -14.594,-14.506 -5.552,-23.548 v3(-5.552,-29.873) -5.552,-31.575 -4.56,-32.567 C55.1@5.802,-32.567 5.802,-28.884 4.862,-27.944 U11.7@2.576,-27.944 ; -69.381,-14.735 -69.381,-10.213 -69.381,-5.184 -69.381,0.023 -68.517,0.886 -62.523,0.886 -57.189,0.886 -54.318,0.886 -53.036,-0.396 -52.49,-0.942 -52.134,-1.298 -52.134,-5.235 -52.134,-10.188 -52.134,-15.446 -53.429,-16.741 -60.643,-16.741 v3(-63.107,-16.741) -64.478,-16.741 -67.374,-16.741 -69.025,-15.09 -69.381,-14.735
  Bottom Layer w0.3: v1(-79.236,6.678) -77.153,4.595 v1(-77.153,2.106) ; v3(-63.107,-16.741) -59.981,-16.741 R11.1@-59.39,-17.332 ; v1(-54.191,-18.697) -54.141,-18.646 -54.141,-16.843 v1(-54.09,-16.792) ; v1(-52.667,-15.954) -51.905,-16.716 v1(-50.204,-16.716) ; C69.2@-22.365,-33.923 -22.365,-32.653 -21.806,-32.094 v3(-21.806,-31.905)
  Bottom Layer w0.4: -25.796,9.954 -25.77,9.98 R37.2@-25.77,12.496
  Bottom Layer w0.5: v1(-76.164,26.718) -76.163,26.72 -73.61,26.72 v1(-73.609,26.721) ; v1(-29.833,-27.993) -29.752,-27.993 -29.447,-27.689 v3(-19.825,-27.689) ; v1(-27.166,6.728) -27.166,9.422 -26.634,9.954 -25.796,9.954 -23.61,9.954 -21.375,12.189 -21.375,19.225 ; v3(-26.886,-14.506) -26.874,-14.494 -26.874,-5.094 v1(-26.863,-5.083) ; C39.2@-21.375,21.13 -21.375,19.225 ; C39.2@-21.241,21.13 -21.241,23.366 U5.3@-21.222,23.385 ; v3@-19.819,-14.462 -19.819,-14.674 v3@-19.812,-14.68 ; -15.444,19.441 C32.2@-15.444,21.283 ; C32.2@-15.374,21.352 -15.374,23.363 U4.3@-15.355,23.382 ; -14.288,19.301 -21.298,19.301 -21.375,19.225
  Bottom Layer w0.8: v1(-76.289,-41.989) -72.048,-41.989 v1(-72.04,-41.982) -72.033,-41.989 -67.806,-41.989 v3(-64.478,-38.661) -63.107,-37.29 v3(-63.107,-16.741) ; v3(-21.806,-31.905) -19.812,-29.911 v3@-19.812,-27.689 ; v3(-19.825,-27.689) v3@-19.812,-27.689 ; v3@-19.812,-14.68 v3@-19.812,-27.689 ; v3(-11.545,-40.49) -8.217,-40.49 -5.552,-37.825 v3(-5.552,-29.873)
  Bottom Layer w1: -64.783,19.251 -59.551,14.018 v3@-59.551,0.912 ; v3(-52.109,-8.791) -42.914,-8.791 v3(-37.199,-14.506)
  other v1: -64.351,19.276 -65.19,19.301 -64.783,19.936
  other v3: -60.491,0.912 -59.602,0.912 -58.738,0.912
VDD_RADAR: C52.1 C53.2 C54.1 L6.2 P5.5 R23.1 VDD_RADAR.1 | length 46.1
  Top Layer w0.5: R23.1@-54.522,30.414 C53.2@-56.173,30.414 -56.173,26.515 -54.318,24.661 C54.1@-49.365,24.661 ; VDD_RADAR.1@-47.003,22.299 -45.454,22.299 -45.403,22.349
  Top Layer w1.5: C52.1@-44.641,24.661 C52.1@-44.091,24.111 ; C52.1@-44.323,23.226 -44.323,22.794 -43.664,22.134 -42.798,22.134 -42.785,22.121 -35.497,22.121 -33.49,24.127 -33.49,29.614 -31.789,31.316 -24.346,31.316 -23.4,32.262 -23.4,33.786 P5.5@-23.381,33.805
VDDA: C8.2 C9.2 C10.2 C11.2 FB1.2 U1.38 U1.39 | length 12.9
  Top Layer w0.3: U1.38@-53.122,-20.779 U1.39@-52.622,-20.779 -52.622,-19.769 -52.032,-19.18 -49.833,-19.18 -47.905,-21.108 FB1.2@-47.905,-21.262 -47.898,-21.269 -47.898,-22.842 -47.892,-22.848 C11.2@-46.825,-22.848 C10.2@-45.403,-22.848 ; C8.2@-49.67,-22.848 C9.2@-48.248,-22.848
Vin: F1.1 P3.1 | length 3.7
  Bottom Layer w2: F1.1@55.739,-37.798 55.739,-36.276 57.211,-34.804 P3.1@57.211,-34.75
Vin_Pr: C30.2 C31.2 C37.1 C38.2 C43.2 C44.2 C47.1 C50.2 C51.2 D2.1 D3.1 L2.1 R6.1 R38.1 U6.4 U8.3 U9.3 | length 20.3
  Top Layer w0.5: R38.1@-77.52,39.266 -75.81,40.975 -66.797,40.975 -64.72,38.898 -64.148,38.898
  Top Layer w2: 45.426,-38.534 46.01,-38.534 ; 46.01,-37.518 v1(49.363,-40.871)
  other v1: 48.296,-55.451 50.811,-55.273 52.309,-55.222 49.388,-54.79 50.607,-54.359 51.649,-54.359 52.639,-54.333 48.271,-53.952 48.271,-52.784 48.271,-51.717 51.496,-51.057 50.531,-50.904 52.36,-50.65 48.271,-50.523 49.591,-50.295 51.319,-50.142 52.36,-49.456 50.607,-49.304 49.337,-49.101 48.22,-48.999 52.055,-48.237 50.607,-48.11 49.337,-47.932 48.22,-47.831 51.852,-47.424 50.607,-47.043 49.337,-46.866 48.22,-46.764 50.607,-45.875 49.337,-45.672 48.22,-45.57 48.118,-44.326 49.363,-44.3 48.118,-43.157 49.363,-43.132 48.118,-42.09 49.363,-42.065 48.118,-40.897 50.379,-40.668 51.446,-40.668 52.614,-40.668
pads on no net: J1.7 J2.4 J2.15 J2.16 P2.1 P2.2 P2.3 P2.4 P5.6 P5.7 U1.11 U1.12 U1.16 U1.17 U1.18 U1.19 U1.24 U1.25 U1.26 U1.27 U1.28 U1.34 U1.35 U1.40 U1.43 U1.44 U1.45 U1.46 U1.47 U1.50 U1.51 U1.52 U1.56 U1.57 U1.58 U1.59 U1.60 U1.63 U1.64 U1.65 U1.73 U1.78 U1.79 U1.80 U1.83 U1.96 U1.97 U1.98 U1.99 U1.100 U1.101 U1.104 U1.105 U1.107 U1.108 U1.109 U1.110 U1.111 U1.112 U1.115 U1.116 U1.117 U1.118 U1.130 U1.131 U1.132 U1.134 U1.143 U1.144 U1.145 U1.146 U1.147 U1.150 U1.151 U1.152 U1.157 U1.160 U1.162 U1.163 U1.164 U1.165 U1.169 U1.170 U1.173 U1.174 U1.175 U1.176 U4.5 U5.5 U10.3 U10.18 U11.5 U11.13 U11.15 U11.16 U11.17 U11.18 U13.4 U13.9 U13.10 U13.11

## Polygon pours and split planes (outlines as drawn)
GND on Bottom Layer "GND_L02_P000" (solid, remove dead copper, pour order 0): -87.906,-68.475 -87.906,41.525 62.094,41.525 62.094,-68.475
GND on Top Layer "GND_L01_P001" (solid, remove dead copper, pour order 1): -87.906,-68.475 -87.906,41.525 62.094,41.525 62.094,-68.475

## Keep-outs
Keep-Out Layer:
  the board outline again, w0.2

## Other copper
Top Layer:
  rectangle net NetC33_1: 28.687,-67.592 36.942,-51.006
  rectangle net Vin_Pr: -62.523,36.65 0.341,40.993
  region net Vin_Pr: 42.098,-29.619 47.219,-26.034 0.33,40.93 -4.79,37.345
  rectangle net Vin_Pr: 42.1,-47.856 47.204,-26.012
  rectangle net NetC34_1: 8.799,-62.487 26.809,-59.058
  rectangle net NetC33_2: 24.625,-54.486 26.86,-47.17
  rectangle net +12V_RK3588: 7.886,-53.419 10.756,-42.065
  rectangle net NetC33_2: 24.345,-45.596 30.467,-44.021
  rectangle net NetC33_1: 31.61,-56.772 35.598,-46.358
  rectangle net NetC33_1: 27.978,-48.72 34.328,-47.043
  rectangle net +5V: -65.266,24.813 -64.631,26.82
  rectangle net GND: -49.225,28.903 -42.126,33.678
  rectangle net GND: -66.256,33.424 -57.316,35.278
  rectangle net GND: -68.923,31.468 -63.31,34.516
  rectangle net VDD_MCU: -65.621,18.87 -63.869,20.063
  rectangle net VDD_MCU: -65.342,20.902 -64.275,23.213
  rectangle net Vin_Pr: -49.086,35.659 -41.822,40.079
  rectangle net VDD_RADAR: -45.733,21.384 -42.914,25.067
  rectangle net NetC40_2: -60.262,30.35 -57.874,32.89
  rectangle net +5V: -68.746,27.937 -61.202,30.325
  rectangle net Vin_Pr: -66.256,37.361 -62.04,40.434
  rectangle net NetC40_2: -64.809,35.608 -63.208,37.031
  rectangle net NetC40_2: -66.18,36.065 -64.605,36.624
  rectangle net VDD_RADAR: -50.026,23.67 -37.681,26.032
  rectangle net NetC49_2: -39.409,32.306 -37.758,35.354
  rectangle net NetC49_2: -48.908,34.389 -47.333,34.948
  rectangle net NetC49_2: -47.537,33.932 -45.936,35.354
  pour cut-out: -36.538,26.759 -36.436,26.759 -34.582,26.759 -34.582,24.498 -35.166,23.914 -36.411,23.914 -42.441,23.914 -42.441,26.759
  region net Vin_Pr: 42.633,-56.213 42.633,-57.407 45.453,-57.407 46.596,-58.55 52.233,-57.635 52.995,-56.543 53.147,-55.425 53.276,-54.359 53.276,-39.754 42.151,-39.754 42.151,-51.946 44.386,-51.946 46.24,-53.8 46.24,-55.349 45.377,-56.213
  region net +12V_RK3588: 21.577,-55.4 17.259,-55.4 15.887,-56.772 15.862,-56.746 11.366,-56.746 7.91,-53.29 7.91,-49.355 10.35,-49.355 13.728,-52.733 21.577,-52.733
  pour cut-out: -50.331,35.38 -49.391,35.38 -49.391,33.253 -49.359,33.221 -50.407,33.221 -50.407,35.303
  pour cut-out: -33.795,-49.38 -33.795,-68.475 -87.897,-68.475 -87.897,-49.38
  text "Controller 1.0" at 37.033,38.176 h1.3
Bottom Layer:
  rectangle net NetD2_2: 58.126,-41.608 59.98,-37.671
  rectangle net Vin_Pr: 47.407,-56.162 55.332,-40.084
  rectangle net VDD_MCU: -65.621,18.87 -63.869,20.317
  rectangle net VDD_MCU: -60.897,0.378 -58.281,1.369
  rectangle net NetC40_2: -64.809,35.608 -63.208,37.031
  rectangle net NetC49_2: -46.749,33.932 -37.758,35.354
  rectangle net NetC49_2: -47.537,33.932 -45.936,35.354
  pour cut-out: -33.808,-49.339 -33.808,-68.434 -87.91,-68.434 -87.91,-49.339
  region net NetC40_2: -63.285,36.421 -59.754,32.89 -57.976,32.89 -57.976,30.655 -59.983,30.655 -60.287,30.985 -64.809,35.507 -64.809,35.608

## Silkscreen, mask and mechanical layers (free items; w line width, h text height)
Top Overlay:
  lines w0.2: -33.694,-68.379 -33.694,41.526 ; -6.16,-68.379 -6.16,10.513 ; -6.16,10.519 62.09,10.519
  text "V_IN" at 52.934,-27.073 h2
  text "RK3588" at 2.972,-39.294 h1.5
Mechanical 1:
  lines w0.2: -5.455,9.842 54.695,9.842

## Text inside footprints (layer, text, board x,y; h text height)
J1: Top Overlay "1" at -24.651,11.91 h1 r90; Top Overlay "2" at -27.318,11.631 h1 r90
P2: Top Overlay "20" at -17.031,16.609 h1 r90; Top Overlay "19" at -14.491,16.609 h1 r90; Top Overlay "1" at -14.491,-10.315 h1 r90; Top Overlay "2" at -17.031,-10.315 h1 r90